# EAGLE board Av_Bay (EAGLE 9.2.2)
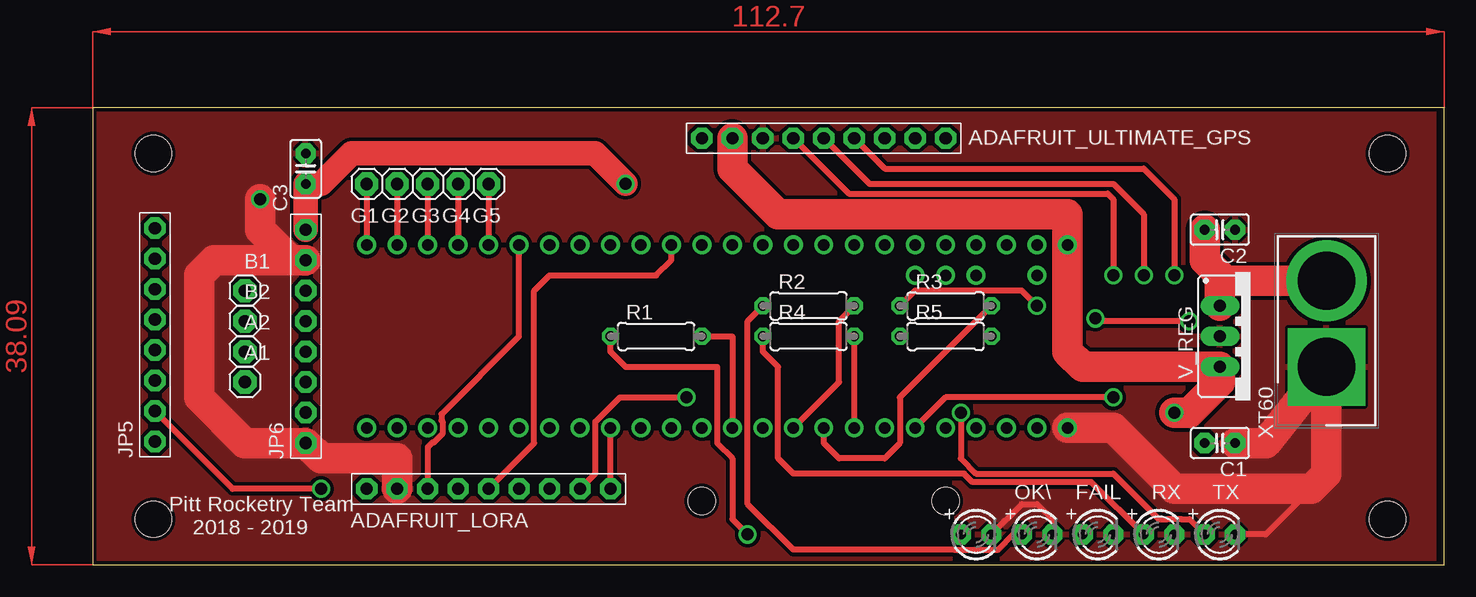
[diagram p0: board, top side]
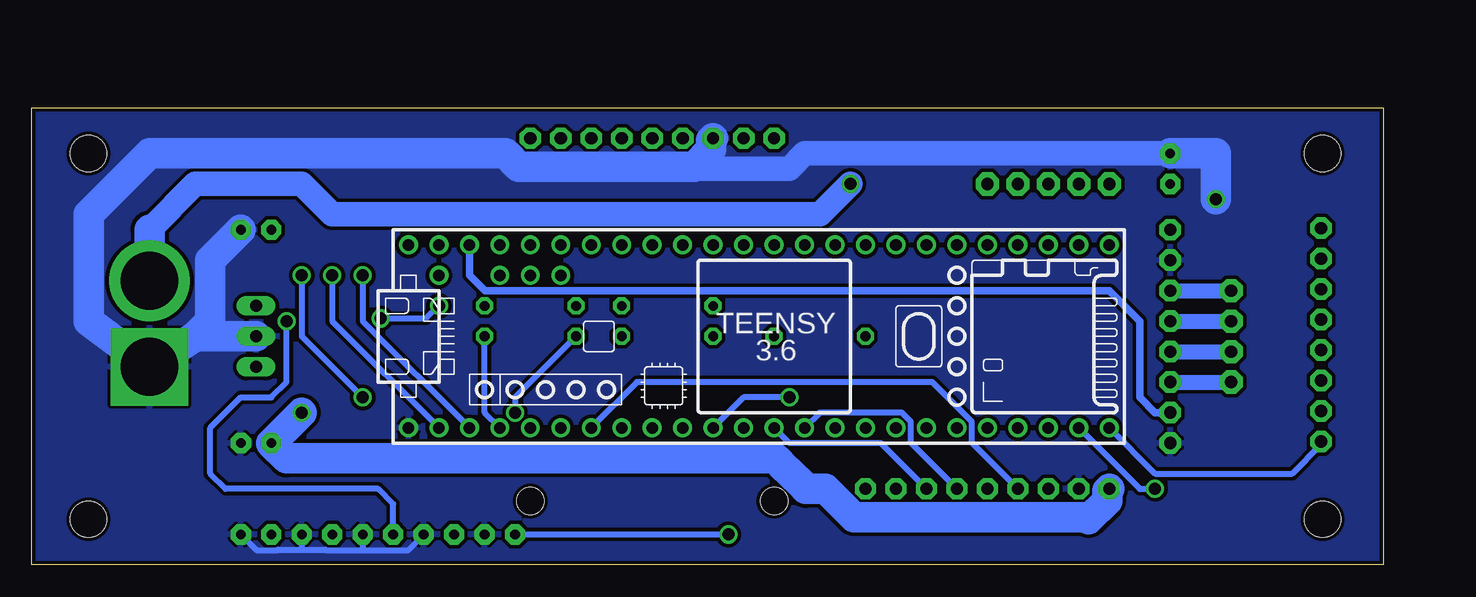
[diagram p1: board, bottom side, seen from below]

Size 112.7 x 38.09 mm. Coordinates in mm from the lower left corner, seen from the top.
Outline: 0,0 112.7,0 112.7,38.09 0,38.09 0,0
Copper layers (1*16): Top 0.035mm / dielectric 1.5mm / Bottom 0.035mm
Design rules "SparkFun": minimum track width 8mil, minimum drill 20mil, track to track 8mil, track to pad 8mil, pad to pad 8mil, via to via 8mil, smd to smd 8mil, copper to edge 8mil, drill to drill 8mil, minimum pad ring 12mil, minimum via ring 10mil, stop-mask expansion 4mil, vias tented up to drill 20mil, thermal gap 10mil
Holes 2.29 mm at 50.8,5.33 71.12,5.33
Holes 3 mm at 5.08,34.29 5.08,3.81 107.95,34.29 107.95,3.81

## Footprints (pad centres in the part's own frame; a part is rotated, then mirrored left to right if it is on the bottom)
1X01 = drill 1.016 pad 1.93 octagon: 1 0,0
1X09-BIG = drill 1.016 pad 1.778 octagon: 1 -10.16,0; 2 -7.62,0; 3 -5.08,0; 4 -2.54,0; 5 0,0; 6 2.54,0; 7 5.08,0; 8 7.62,0; 9 10.16,0
C025-025X050 = drill 0.813 pad 1.676 octagon: 1 -1.27,0; 2 1.27,0
LED3MM = drill 0.813 pad 1.676 octagon: A -1.27,0; K 1.27,0
1X08-BIG = drill 1.016 pad 1.778 octagon: 1 -8.89,0; 2 -6.35,0; 3 -3.81,0; 4 -1.27,0; 5 1.27,0; 6 3.81,0; 7 6.35,0; 8 8.89,0
0207/7 = drill 0.813 octagon: 1 -3.81,0; 2 3.81,0
TEENSY_3.5/3.6_BASIC = drill 0.965: 0/RX -25.4,-7.62; 1/TX -22.86,-7.62; 2 -20.32,-7.62; 3/CANTX -17.78,-7.62; 3V3 7.62,-7.62; 3V3_LO -22.86,7.62; 4/CANRX -15.24,-7.62; 5 -12.7,-7.62; 6 -10.16,-7.62; 7 -7.62,-7.62; 8 -5.08,-7.62; 9/CS -2.54,-7.62; 10/CS 0,-7.62; 11/MOSI 2.54,-7.62; 12/MISO 5.08,-7.62; 13/SCK 5.08,7.62; 14/A0 2.54,7.62; 15/A1 0,7.62; 16/A2 -2.54,7.62; 17/A3 -5.08,7.62; 18/A4/SDA -7.62,7.62; 19/A5/SCL -10.16,7.62; 20/A6 -12.7,7.62; 21/A7 -15.24,7.62; 21/DAC0 12.7,7.62; 22/A8 -17.78,7.62; 23/A9 -20.32,7.62; 24 10.16,-7.62; 25 12.7,-7.62; 26 15.24,-7.62; 27 17.78,-7.62; 28 20.32,-7.62; 29 22.86,-7.62; 30 25.4,-7.62; 31/A12 27.94,-7.62; 32/A13 30.48,-7.62; 33/A14 30.48,7.62; 34/A15 27.94,7.62; 35/A16 25.4,7.62; 36/A17 22.86,7.62; 37/A18 20.32,7.62; 38/A19 17.78,7.62; 39/A20 15.24,7.62; A10 -17.78,5.08; A11 -15.24,5.08; A22/DAC1 10.16,7.62; AGND -25.4,7.62; AREF -20.32,5.08; GND -27.94,-7.62; GND2 7.62,7.62; VIN -27.94,7.62; VUSB -25.4,5.08
317TS = drill 1.016 long: 1 -2.54,-2.54; 2 0,-2.54; 3 2.54,-2.54
SHDR2W320P716_1X2_1574X813X158 = drill 4.826 pad 6.452 square: 1 1.27,0 | drill 4.826 pad 6.731: 2 8.433,0

## Placement (x,y rotation side)
A1  [1X01]  12.7,15.24 0 top
A2  [1X01]  12.7,17.78 0 top
ADAFRUIT_LORA  [1X09-BIG]  33.02,6.35 0 top
ADAFRUIT_ULTIMATE_GPS  [1X09-BIG]  60.96,35.56 180 top
B1  [1X01]  12.7,22.86 0 top
B2  [1X01]  12.7,20.32 0 top
C1  [C025-025X050]  93.98,10.16 180 top
C2  [C025-025X050]  93.98,27.94 180 top
C3  [C025-025X050]  17.78,33.02 90 top
FAIL  [LED3MM]  83.82,2.54 0 top
G1  [1X01]  22.86,31.75 0 top
G2  [1X01]  25.4,31.75 0 top
G3  [1X01]  27.94,31.75 0 top
G4  [1X01]  30.48,31.75 0 top
G5  [1X01]  33.02,31.75 0 top
JP5  [1X08-BIG]  5.21,19.18 90 top
JP6  [1X08-BIG]  17.78,19.05 90 top
LED5  [LED3MM]  73.66,2.54 0 top
OK\  [LED3MM]  78.74,2.54 0 top
R1  [0207/7]  46.99,19.05 0 top
R2  [0207/7]  59.69,21.59 0 top
R3  [0207/7]  71.12,21.59 0 top
R4  [0207/7]  59.69,19.05 0 top
R5  [0207/7]  71.12,19.05 0 top
RX  [LED3MM]  88.9,2.54 0 top
TX  [LED3MM]  93.98,2.54 0 top
U$1  TEENSY_3.5/3.6_BASIC  [TEENSY_3.5/3.6_BASIC]  53.34,19.05 0 bottom
V_REG  [317TS]  96.52,19.05 270 top
XT60  PRT-10474  [SHDR2W320P716_1X2_1574X813X158]  102.87,15.24 90 top

## Library data of the parts
A1 A2 ADAFRUIT_LORA ADAFRUIT_ULTIMATE_GPS B1 B2 C1-C3 FAIL G1-G5 JP5 JP6 LED5 OK\ R1-R5 RX TX = adafruit
U$1 = Teensy356
V_REG = v-reg
XT60 = SamacSys_Parts; DESCRIPTION: Soldering Workstation Equipment XT60 Connectors Male/Female Pair; HEIGHT: 15.875mm; MANUFACTURER_NAME: SparkFun; MANUFACTURER_PART_NUMBER: PRT-10474; MOUSER_PART_NUMBER: 474-PRT-10474; MOUSER_PRICE-STOCK: https://www.mouser.com/Search/Refine.aspx?Keyword=474-PRT-10474

## Nets
5V_SUPP: ADAFRUIT_LORA.1 ADAFRUIT_ULTIMATE_GPS.8 C1.2 U$1.VIN V_REG.3
A1: A1.1 JP6.3
A2: A2.1 JP6.4
B1: B1.1 JP6.6
B2: B2.1 JP6.5
CS: ADAFRUIT_LORA.8 U$1.9/CS
DIR: JP5.1 U$1.32/A13
EN_LORA: ADAFRUIT_LORA.3 U$1.38/A19
ERR_LED: R3.2 U$1.7
EXTRA_LED: R1.2 U$1.10/CS
FAULT: JP6.2 U$1.3V3_LO
FIX: ADAFRUIT_ULTIMATE_GPS.4 U$1.4/CANRX
G0: ADAFRUIT_LORA.4 U$1.5
G1: G1.1 U$1.33/A14
G2: G2.1 U$1.34/A15
G3: G3.1 U$1.35/A16
G4: G4.1 U$1.36/A17
G5: G5.1 U$1.37/A18
GND: ADAFRUIT_LORA.2 ADAFRUIT_ULTIMATE_GPS.7 C1.1 C2.1 C3.2 FAIL.K JP6.1 JP6.7 LED5.K OK\.K RX.K TX.K U$1.GND V_REG.2 XT60.1
GPS_3.3V: ADAFRUIT_ULTIMATE_GPS.1
LOGIC_POWER: U$1.3V3
MASTER_BATT_IN: C2.2 C3.1 JP6.8 V_REG.1 XT60.2
MISO: ADAFRUIT_LORA.6 U$1.12/MISO
MOSI: ADAFRUIT_LORA.7 U$1.11/MOSI
N$1: R5.1 TX.A
N$2: R4.1 RX.A
N$3: FAIL.A R3.1
N$4: OK\.A R2.1
N$5: JP5.3
N$6: LED5.A R1.1
OK_LED: R2.2 U$1.8
RST: ADAFRUIT_LORA.9 U$1.24
RX: ADAFRUIT_ULTIMATE_GPS.6 U$1.1/TX
RX_LED: R4.2 U$1.6
SCK: ADAFRUIT_LORA.5 U$1.13/SCK
STEP: JP5.2 U$1.31/A12
TX: ADAFRUIT_ULTIMATE_GPS.5 U$1.0/RX
TX_LED: R5.2 U$1.2
VBAT: ADAFRUIT_ULTIMATE_GPS.3

## Tracks (layer width: path | path; a pad name or v marks a point on that pad's centre or on a via)
5V_SUPP  (via drill 1)
  Top 2.54: ADAFRUIT_ULTIMATE_GPS.8 53.34,33.02 57.15,29.21 81.28,29.21 U$1.VIN 81.28,17.78 82.55,16.51 V_REG.3 93.98,15.24 91.44,12.7 v90.17,12.7
  Bottom 2.54: ADAFRUIT_LORA.1 23.04,6.17 23.04,5.37 24.6,3.81 24.78,3.99 44.16,3.99 46.52,6.35 48.16,6.35 48.18,6.37 48.18,6.42 49.72,7.95 49.76,7.95 50.7,8.89 91.44,8.89 C1.2 v90.17,12.7
A1
  Bottom 1.27: JP6.3 A1.1
A2
  Bottom 1.27: JP6.4 A2.1
B1
  Bottom 1.27: JP6.6 B1.1
B2
  Bottom 1.27: JP6.5 B2.1
CS  (via drill 1)
  Top 0.508: ADAFRUIT_LORA.8 41.93,7.64 41.93,11.95 43.96,13.97 v49.53,13.97
  Bottom 0.508: v49.53,13.97 53.34,13.97 U$1.9/CS
DIR
  Bottom 0.508: U$1.32/A13 19.05,7.62 7.62,7.62 5.21,10.03 JP5.1
EN_LORA
  Top 0.508: ADAFRUIT_LORA.3 27.94,9.81 28.31,10.19 28.46,10.19 29.18,10.91 29.18,11.95 29.08,12.05 29.08,12.57 35.56,19.05 U$1.38/A19
ERR_LED
  Top 0.508: U$1.7 60.96,10.16 62.23,8.89 66.04,8.89 67.31,10.16 67.31,13.97 R3.2
EXTRA_LED
  Top 0.508: R1.2 53.34,19.05 U$1.10/CS
FAULT
  Bottom 0.61: U$1.3V3_LO 76.2,24.13 74.91,22.84 68.04,22.84 68.02,22.86 22.86,22.86 20.32,20.32 20.32,13.97 19.05,12.7 JP6.2
FIX  (via drill 1)
  Top 0.508: ADAFRUIT_ULTIMATE_GPS.4 66.04,33.02 87.63,33.02 90.17,30.48 v90.17,24.13 | U$1.4/CANRX 71.12,13.97 v85.09,13.97
  Bottom 0.508: v85.09,13.97 90.17,19.05 v90.17,24.13
G0
  Bottom 0.508: ADAFRUIT_LORA.4 34.31,10.19 34.31,11.95 37.61,15.24 62.23,15.24 U$1.5
G1
  Top 0.508: G1.1 U$1.33/A14
G2
  Top 0.508: G2.1 U$1.34/A15
G3
  Top 0.508: G3.1 U$1.35/A16
G4
  Top 0.508: G4.1 U$1.36/A17
G5
  Top 0.508: G5.1 U$1.37/A18
GND  (via drill 1)
  Top 0.508: 101.6,6.35 97.79,2.54 TX.K | LED5.K 77.47,5.08 78.74,5.08 80.01,3.81 OK\.K
  Top 2.54: C1.1 97.79,10.16 XT60.1 102.87,7.62 101.6,6.35 90.17,6.35 85.09,11.43 U$1.GND | v13.97,30.48 13.97,27.94 16.51,25.4 JP6.7 10.16,25.4 8.89,24.13 8.89,13.97 12.7,10.16 JP6.1 19.05,8.89 25.4,8.89 ADAFRUIT_LORA.2
  Bottom 0.508: TX.K 93.95,1.24 92.17,1.24 92.15,1.27 90.17,1.27 | 85.09,1.24 88.17,1.24 88.19,1.27 90.17,1.27 | 85.09,1.24 81.31,1.24 OK\.K | FAIL.K 85.09,1.24 | RX.K 90.17,1.27
  Bottom 2.032: 57.44,33.2 57.26,33.02 49.53,33.02 48.26,34.29 C3.2
  Bottom 2.54: V_REG.2 99.06,19.05 | 99.06,19.05 XT60.1 107.95,20.32 107.95,29.21 102.87,34.29 73.19,34.29 72.1,33.2 57.44,33.2 56.06,34.58 56.06,35.38 ADAFRUIT_ULTIMATE_GPS.7 | 99.06,19.05 97.79,20.32 97.79,25.4 C2.1 | C3.2 13.97,34.29 v13.97,30.48
  pour Top (isolate 0.305): 0,38.1 111.76,38.1 111.76,0 0,0
  pour Bottom (isolate 0.305): 0,38.1 113.03,38.1 113.03,0 0,0
MASTER_BATT_IN  (via drill 1)
  Top 2.032: JP6.8 C3.1 19.05,31.75 21.59,34.29 41.91,34.29 v44.45,31.75
  Top 2.54: 93.98,24.13 V_REG.1 | 93.98,24.13 92.71,25.4 C2.2 | 93.98,24.13 94.44,23.67 XT60.2
  Bottom 2.032: v44.45,31.75 46.99,29.21 87.63,29.21 90.17,31.75 99.06,31.75 102.87,27.94
  Bottom 2.54: 102.87,27.94 XT60.2
MISO
  Bottom 0.508: ADAFRUIT_LORA.6 39.39,10.19 39.39,11.95 40.15,12.7 46.99,12.7 U$1.12/MISO
MOSI
  Bottom 0.508: ADAFRUIT_LORA.7 41.91,10.16 49.53,10.16 U$1.11/MOSI
N$1  (via drill 1)
  Top 0.508: v72.39,12.7 72.39,8.89 73.66,7.62 85.09,7.62 88.9,3.81 89.61,3.81 89.63,3.84 90.71,3.84 90.73,3.81 91.44,3.81 TX.A
  Bottom 0.508: R5.1 72.39,13.97 v72.39,12.7
N$2
  Top 0.508: RX.A 83.26,6.91 73.37,6.91 72.65,7.62 58.42,7.62 57.15,8.89 57.15,16.51 55.88,17.78 R4.1
N$3  (via drill 1)
  Top 0.508: v91.44,20.32 83.82,20.32 v83.6,20.54 | v78.74,21.59 77.47,22.86 68.58,22.86 R3.1
  Bottom 0.508: FAIL.A 82.55,5.08 83.82,6.35 96.52,6.35 97.79,7.62 97.79,11.43 95.25,13.97 92.71,13.97 91.44,15.24 v91.44,20.32 | v83.6,20.54 79.79,20.54 v78.74,21.59
N$4
  Top 0.508: R2.1 54.61,20.32 54.61,5.08 58.42,1.27 71.83,1.27 71.85,1.24 75.47,1.24 76.76,2.54 OK\.A
N$6  (via drill 1)
  Top 0.508: R1.1 43.18,17.78 44.45,16.51 52.07,16.51 52.07,10.16 53.34,8.89 53.34,3.81 v54.61,2.54
  Bottom 0.508: LED5.A v54.61,2.54
OK_LED
  Top 0.508: U$1.8 62.23,15.24 62.23,20.32 R2.2
RST
  Top 0.508: ADAFRUIT_LORA.9 U$1.24
RX  (via drill 1)
  Top 0.508: ADAFRUIT_ULTIMATE_GPS.6 63.04,30.94 84.63,30.94 85.09,30.48 v85.09,24.13
  Bottom 0.508: v85.09,24.13 85.09,20.32 U$1.1/TX
RX_LED
  Top 0.508: U$1.6 R4.2
SCK
  Top 0.508: ADAFRUIT_LORA.5 36.83,10.16 36.83,22.86 38.1,24.13 46.99,24.13 48.26,25.4 U$1.13/SCK
STEP  (via drill 1)
  Top 0.508: v19.05,6.35 11.68,6.35 JP5.2
  Bottom 0.508: U$1.31/A12 20.32,6.35 v19.05,6.35
TX  (via drill 1)
  Top 0.508: ADAFRUIT_ULTIMATE_GPS.5 64.77,31.75 85.09,31.75 87.63,29.21 v87.63,24.13
  Bottom 0.508: v87.63,24.13 87.63,20.32 U$1.0/RX
TX_LED
  Bottom 0.508: U$1.2 74.93,12.7 R5.2
(copper drawn outside any net)
  shapes: Top area x2

## Text on the board
tPlace: Pitt Rocketry Team / 2018 - 2019